# Altium PCB PCB2.PcbDoc (part 2 of 3)
Units mil, origin at the board's own origin, x right, y up, seen from the top; angles counter-clockwise.
Board outline 11695.71 x 3821.7 mil, 2 copper layers (Top Layer, Bottom Layer), stack 16 mil thick; 124 components, 59 nets, 380 pads, 1798 vias.
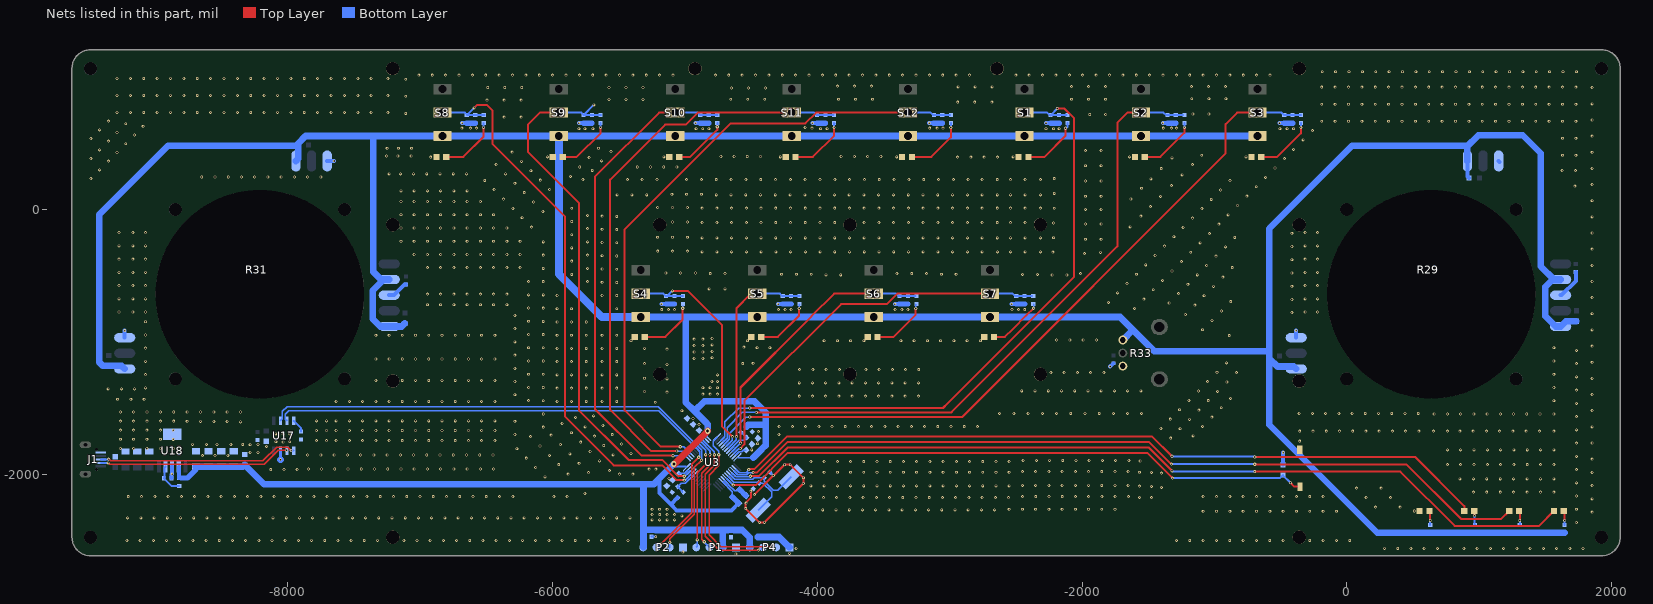
[diagram p2: the nets of this part, all layers, seen from the top]

## Via types
v1: diameter 22, hole 12, Top Layer to Bottom Layer, tented both sides, 1735 vias
v2: diameter 24, hole 12, Top Layer to Bottom Layer, tented both sides, 61 vias
v3: diameter 44, hole 22, Top Layer to Bottom Layer, tented both sides, 2 vias

## Nets (pads, with @x,y where several pads share a name; then routed paths per layer and width w, separated by ;. In a path a pad name is that pad's centre, name@x,y a point inside that pad or via, vN(x,y) a via of type N, cw(c..) or ccw(c..) an arc to the next point about the centre after c; other vN are vias at no path point) (continued)
AGND: "pad. "@-358.47,1063.88 "pad. "@-358.47,-116.12 "pad. "@-358.47,-1296.12 "pad. "@-358.47,-2476.12 "pad. "@-2314.51,-115 "pad. "@-2314.51,-1245 "pad. "@-2641.47,1063.88 "pad. "@-3752.26,-115 "pad. "@-3752.26,-1245 "pad. "@-4924.47,1063.88 "pad. "@-5190,-115 "pad. "@-5190,-1245 "pad. "@-7207.47,1063.88 "pad. "@-7207.47,-116.12 "pad. "@-7207.47,-1296.12 "pad. "@-7207.47,-2476.12 C1.1 C2.1 C3.2 C4.2 C5.2 C6.2 C7.2 C8.2 C9.2 C10.2 C11.2 C12.2 C13.2 C14.2 C15.1 C16.1 C17.2 C18.1 C19.1 C26.1 C27.1 C28.2 C30.1 C43.1 C44.1 C45.1 C46.1 C47.1 C48.1 C49.1 C66.2 C67.2 C68.2 C69.2 C70.2 C71.2 C72.2 C73.2 C102.2 C103.2 C104.2 C108.2 J1.5 P1.1 P2.1 P4.1 R2.1 R4.1 R6.1 R8.1 R10.1 R12.1 R14.1 R16.1 R18.1 R20.1 R22.1 R24.1 R29.3 R29.6 R29.11 R30.1 R31.3 R31.6 R31.11 R32.1 R33.3 R82.1 R83.1 R88.2 U1.2 U2.2 U3.8 U3.23 U3.35 U3.47 U4.2 U5.2 U6.2 U7.2 U8.2 U9.2 U10.2 U11.2 U12.2 U13.2 U17.3 U18.3 U18.6 U21.2 Y6.2 | length 4070.4
  Top Layer w15: v1(-4501.77,-2128.43) -4501.77,-2176.77 -4537.67,-2212.67 v1(-4537.67,-2218.5) -4540.41,-2221.24 v1(-4540.41,-2260.07) v1(-4436.98,-2363.5) v1(-4398.72,-2363.5) v1(-4105.41,-2070.2) v1(-4105.41,-2026.94) v1(-4203.84,-1928.5) v1(-4247.67,-1928.5) -4329.17,-2010 v1(-4331.28,-2010) v1(-4475,-2153.72)
  Top Layer w30: U8.2@-6879.26,395 U8.2@-6877.39,396.87
  Bottom Layer w10: C71.2@-5047.68,-1998.96 -5040.73,-1992 -5002,-1992 U3.23@-4980,-1970 ; U3.8@-4700.85,-2044.46 -4667.34,-2077.97 -4667.34,-2082.66 -4624.99,-2125 -4593.75,-2125 C103.2@-4585.58,-2116.82 ; U3.47@-4617.33,-1857.94 -4589.29,-1829.9 -4572.37,-1829.9 -4560.76,-1818.29 C73.2@-4538.26,-1818.29 ; C69.2@-4539.06,-2163.33 C69.2@-4537.64,-2163.33 C69.2@-4533.93,-2163.33
  Bottom Layer w15: C19.1@-5252.97,-2472.3 v1(-5220,-2472.3) ; C26.1@-4357.42,-1985.29 -4355.99,-1985.29 v1(-4331.28,-2010)
  Bottom Layer w25: v1@-8055.47,-1889.85 U17.3@-8055.47,-1822.09
  Bottom Layer w30: R31.11@-9231.75,-968.5 v1(-9231.75,-915) ; R88.2@-8877.08,-2030.5 -8877.08,-2003.26 v1(-8873.66,-1999.84) U18.3@-8873.66,-1943.04 ; R31.6@-7702.23,366.14 v1(-7650,366.14) ; R31.3@-7233.72,-647.64 -7197.64,-647.64 -7116.92,-566.92 R32.1@-7106.54,-566.92 ; v1(-6682.81,652.19) C10.2@-6647.7,652.19 ; v1(-5800.67,652.19) C11.2@-5765.56,652.19 ; v1@-5178.52,-714.84 v1(-5177.88,-714.84) C6.2@-5143.42,-714.84 ; v1(-4918.52,652.19) C12.2@-4883.42,652.19 ; v1@-4296.6,-714.84 v1(-4295.95,-714.84) C7.2@-4261.49,-714.84 ; v1(-4036.38,652.19) C13.2@-4001.27,652.19 ; v1@-3414.67,-714.84 v1(-3414.02,-714.84) C8.2@-3379.56,-714.84 ; v1(-3154.24,652.19) C14.2@-3119.13,652.19 ; v1@-2532.74,-714.84 v1(-2532.1,-714.84) C9.2@-2496.99,-714.84 ; v1(-2272.1,652.19) C3.2@-2236.99,652.19 ; v1(-1787.05,-1186.63) C28.2@-1762.23,-1161.81 ; v1(-1389.95,652.19) C4.2@-1354.84,652.19 ; v1(-507.81,652.19) C5.2@-472.7,652.19 ; C108.2@-482.51,-1928.26 -480,-1925.75 v1(-480,-1837.41) ; R29.11@-381.89,-968.5 v1(-381.89,-915) ; R29.6@1147.64,366.14 R29.6@1154.22,359.56 ; R29.3@1616.14,-647.64 1622.23,-647.64 1730.5,-539.37 R30.1@1730.5,-471.92
  Bottom Layer w40: C10.2@-6647.7,652.19 R16.1@-6583.6,652.19 ; C11.2@-5765.56,652.19 R18.1@-5701.59,652.19 R18.1@-5701.46,652.19 ; C6.2@-5143.42,-714.84 R8.1@-5079.31,-714.84 ; C12.2@-4883.42,652.19 R20.1@-4820,652.19 R20.1@-4819.31,652.19 ; C103.2@-4585.58,-2116.82 C69.2@-4539.06,-2163.33 ; C7.2@-4261.49,-714.84 C7.2@-4261.27,-714.84 R10.1@-4197.39,-714.84 ; C13.2@-4001.27,652.19 R22.1@-3937.56,652.19 R22.1@-3937.17,652.19 ; C8.2@-3379.56,-714.84 C8.2@-3379.13,-714.84 R12.1@-3315.46,-714.84 ; C14.2@-3119.13,652.19 R24.1@-3055.54,652.19 R24.1@-3055.03,652.19 ; C9.2@-2496.99,-714.84 R14.1@-2433.53,-714.84 ; C3.2@-2236.99,652.19 R2.1@-2173.53,652.19 R2.1@-2172.89,652.19 ; C4.2@-1354.84,652.19 R4.1@-1290.74,652.19 ; C5.2@-472.7,652.19 R6.1@-409.5,652.19 R6.1@-408.6,652.19
  Bottom Layer w50: v1@-8055.47,-1889.85 v1(-8055,-1890.32) ; C18.1@-4450.55,-2474.6 -4288.4,-2474.6 P4.1@-4210,-2553
  other v1: -4615,-2603 -4210,-2597.67 -5015,-2589.28 -4160,-2560 285,-2560 385,-2560 485,-2560 585,-2560 685,-2560 785,-2560 885,-2560 985,-2560 1085,-2560 1185,-2560 1285,-2560 1385,-2560 1485,-2560 1585,-2560 1685,-2560 1785,-2560 -9215,-2500 -9115.39,-2500 -9015.79,-2500 -8916.18,-2500 -8816.58,-2500 -8716.97,-2500 -8617.37,-2500 -8517.76,-2500 -8418.16,-2500 -8318.55,-2500 -8218.95,-2500 -8119.34,-2500 -8019.74,-2500 -7920.13,-2500 -7820.53,-2500 -7720.92,-2500 -7621.32,-2500 -7521.71,-2500 -7422.11,-2500 -7322.5,-2500 -7222.9,-2500 -7123.29,-2500 -7023.69,-2500 -6924.08,-2500 -6824.48,-2500 -6724.87,-2500 -6625.26,-2500 -6525.66,-2500 -6426.05,-2500 -6326.45,-2500 -6226.84,-2500 -6127.24,-2500 -6027.63,-2500 -5928.03,-2500 -5828.42,-2500 -5728.82,-2500 -5629.21,-2500 -5529.61,-2500 -5430,-2500 -1287.11,-2500 -1186.32,-2500 -1085.53,-2500 -984.74,-2500 -883.95,-2500 -783.16,-2500 -682.37,-2500 -581.58,-2500 -480.79,-2500 -380,-2500 -279.35,-2500 -178.69,-2500 -78.03,-2500 22.63,-2500 1735,-2365 -5247.1,-2345 -5190.58,-2345 -5134.06,-2345 -5077.54,-2345 -9210,-2330 -9110.13,-2330 -9010.26,-2330 -8910.39,-2330 -8810.53,-2330 -8710.66,-2330 -8610.79,-2330 -8510.92,-2330 -8411.05,-2330 -8311.18,-2330 -8211.32,-2330 -8111.45,-2330 -8011.58,-2330 -7911.71,-2330 -7811.84,-2330 -7711.97,-2330 -7612.11,-2330 -7512.24,-2330 -7412.37,-2330 -7312.5,-2330 -7212.63,-2330 -7112.76,-2330 -7012.9,-2330 -6913.03,-2330 -6813.16,-2330 -6713.29,-2330 -6613.42,-2330 -6513.55,-2330 -6413.68,-2330 -6313.82,-2330 -6213.95,-2330 -6114.08,-2330 -6014.21,-2330 -5914.34,-2330 -5814.47,-2330 -5714.61,-2330 -5614.74,-2330 -5514.87,-2330 -5415,-2330 -5023.11,-2315 -5247.1,-2305 -5190,-2305 -5134.06,-2305 -5077.54,-2305 1853.73,-2286.35 -1084.61,-2280 -983.95,-2280 -883.29,-2280 -782.64,-2280 -681.98,-2280 -581.32,-2280 -480.66,-2280 -380,-2280 -279.35,-2280 -178.69,-2280 -78.03,-2280 510,-2278.13 -4158.03,-2270 -4058.16,-2270 -3958.29,-2270 -3858.42,-2270 -3758.55,-2270 -3658.68,-2270 -3558.82,-2270 -3458.95,-2270 -3359.08,-2270 -3259.21,-2270 -3159.34,-2270 -3059.47,-2270 -2959.61,-2270 -2859.74,-2270 -2759.87,-2270 -2660,-2270 -5247.1,-2265 -5190.58,-2265 -5134.06,-2265 -2550,-2265 -2450.13,-2265 -2350.26,-2265 -2250.39,-2265 -2150.53,-2265 -2050.66,-2265 -1950.79,-2265 -1850.92,-2265 -1751.05,-2265 1735,-2265 218.28,-2248.28 403.28,-2248.28 1853.73,-2186.35 -4053.03,-2176.56 -3953.16,-2176.56 -3853.29,-2176.56 -3753.42,-2176.56 -3653.55,-2176.56 -3553.68,-2176.56 -3453.82,-2176.56 -3353.95,-2176.56 -3254.08,-2176.56 -3154.21,-2176.56 -3054.34,-2176.56 -2954.47,-2176.56 -2854.61,-2176.56 -2754.74,-2176.56 -2654.87,-2176.56 -2555,-2176.56 -1474.67,-2176.56 146.56,-2176.56 331.56,-2176.56 -1565,-2175 -9205,-2170 -9104.83,-2170 -9004.66,-2170 -8904.48,-2170 -8804.31,-2170 -8704.14,-2170 -8603.97,-2170 -8503.79,-2170 -8403.62,-2170 -8303.45,-2170 -8203.28,-2170 -8103.1,-2170 -8002.93,-2170 -7902.76,-2170 -7802.59,-2170 -7702.41,-2170 -7602.24,-2170 -7502.07,-2170 -7401.9,-2170 -7301.72,-2170 -7201.55,-2170 -7101.38,-2170 -7001.21,-2170 -6901.03,-2170 -6800.86,-2170 -6700.69,-2170 -6600.52,-2170 -6500.35,-2170 -6400.17,-2170 -6300,-2170 -2449,-2170 -2349.13,-2170 -2249.27,-2170 -2149.4,-2170 -2049.53,-2170 -1949.66,-2170 -1849.79,-2170 -1749.92,-2170 -1650.05,-2170 -1084.61,-2170 -983.95,-2170 -883.29,-2170 -782.64,-2170 -681.98,-2170 -581.32,-2170 -480.66,-2170 -380.01,-2170 -279.35,-2170 -178.69,-2170 -5990,-2169.06 -5890,-2169.06 1735,-2165 -5755,-2145 956.43,-2135.55 1057.86,-2135.55 1159.29,-2135.55 1260.71,-2135.55 1362.14,-2135.55 1463.57,-2135.55 1565,-2135.55 74.84,-2104.84 259.84,-2104.84 -1400,-2100 -1475.8,-2091.56 -1566.13,-2090 -4048.03,-2087.92 -3948.16,-2087.92 -3848.29,-2087.92 -3748.42,-2087.92 -3648.55,-2087.92 -3548.68,-2087.92 -3448.82,-2087.92 -3348.95,-2087.92 -3249.08,-2087.92 -3149.21,-2087.92 -3049.34,-2087.92 -2949.47,-2087.92 -2849.61,-2087.92 -2749.74,-2087.92 -2649.87,-2087.92 -2550,-2087.92 1853.73,-2086.35 -2450.13,-2085 -2350.26,-2085 -2250.39,-2085 -2150.53,-2085 -2050.66,-2085 -1950.79,-2085 -1850.92,-2085 -1751.05,-2085 -1651.18,-2085 1735,-2065 855,-2035 956.43,-2035 1057.86,-2035 1159.29,-2035 1260.71,-2035 1362.14,-2035 1463.57,-2035 1565,-2035 -5120,-2032 -6057.16,-2019.93 -5493.83,-2000 -5393.16,-2000 -5882.16,-1998.96 -1400,-1992.3 -5728.1,-1987.84 -1475.8,-1986.56 1853.73,-1986.35 -4048.03,-1985 -3948.16,-1985 -3848.29,-1985 -3748.42,-1985 -3648.55,-1985 -3548.68,-1985 -3448.82,-1985 -3348.95,-1985 -3249.08,-1985 -3149.21,-1985 -3049.34,-1985 -2949.47,-1985 -2849.61,-1985 -2749.74,-1985 -2649.87,-1985 -2550,-1985 -1566.13,-1985 -2450.13,-1980 -2350.26,-1980 -2250.39,-1980 -2150.53,-1980 -2050.66,-1980 -1950.79,-1980 -1850.92,-1980 -1751.05,-1980 -1651.18,-1980 -5570,-1973.42 -8128.81,-1965.39 -8028.81,-1965.39 -7928.81,-1965.39 1735,-1965 -5270,-1961.76 -5219.67,-1961.89 -7845,-1960.95 -7745,-1960.95 -7645,-1960.95 -7545,-1960.95 -7445,-1960.95 -7345,-1960.95 -7245,-1960.95 -7145,-1960.95 -7045,-1960.95 -6945,-1960.95 -6845,-1960.95 -6745,-1960.95 -6645,-1960.95 -6545,-1960.95 -6445,-1960.95 -6127.87,-1949.22 -5952.87,-1928.25 760,-1928.26 860.62,-1928.26 961.25,-1928.26 1061.87,-1928.26 1162.5,-1928.26 1263.12,-1928.26 1363.75,-1928.26 1464.37,-1928.26 1565,-1928.26 -5798.81,-1917.13 -4048.03,-1905 -3948.16,-1905 -3848.29,-1905 -3748.42,-1905 -3648.55,-1905 -3548.68,-1905 -3448.82,-1905 -3348.95,-1905 -3249.08,-1905 -3149.21,-1905 -3049.34,-1905 -2949.47,-1905 -2849.61,-1905 -2749.74,-1905 -2649.87,-1905 -2550,-1905 -1561,-1900 -5645.19,-1899.13 -2445,-1895 -2345.13,-1895 -2245.26,-1895 -2145.39,-1895 -2045.53,-1895 -1945.66,-1895 -1845.79,-1895 -1745.92,-1895 -1646.05,-1895 1853.73,-1886.35 -6198.58,-1878.51 1735,-1865 -8645,-1860 -8550,-1860 -8451.97,-1857.94 -6023.58,-1857.54 -7850,-1855 -7750,-1855 -7650,-1855 -7550,-1855 -7450,-1855 -7350,-1855 -7250,-1855 -7150,-1855 -7050,-1855 -6950,-1855 -6850,-1855 -6750,-1855 -6650,-1855 -6550,-1855 -6450,-1855 -5542.16,-1854.14 -5869.52,-1846.42 -5407.16,-1842.84 -8285,-1835 -8225,-1835 -5715.9,-1828.42 -4495,-1816.18 760,-1816.18 860.62,-1816.18 961.25,-1816.18 1061.87,-1816.18 1162.5,-1816.18 1263.12,-1816.18 1363.75,-1816.18 1464.37,-1816.18 1565,-1816.18 -6269.29,-1807.8 -9265,-1806.12 -9165,-1806.12 -9065,-1806.12 -8962.32,-1806.12 -8865,-1806.12 -8160,-1790 -6094.29,-1786.83 -5612.87,-1783.43 -8285,-1777.4 -5940.23,-1775.71 -8720,-1775 -8615,-1775 -8535,-1775 -8430,-1775 -8225,-1775 -8340,-1774.42 -5477.87,-1772.13 -4450.47,-1770 1735,-1765 1853.73,-1764.34 -5786.61,-1757.71 -8035,-1756.72 -8090,-1755 -7985,-1755 -354.85,-1750.15 -7783.9,-1746.58 -7707.32,-1746.58 -7635,-1746.58 -7535,-1746.58 -7435,-1746.58 -7335,-1746.58 -7235,-1746.58 -7135,-1746.58 -7035,-1746.58 -6935,-1746.58 -6835,-1746.58 -6735,-1746.58 -6635,-1746.58 -6535,-1746.58 -6435,-1746.58 -8865,-1737.09 -9265,-1736.25 -9165,-1736.25 -9065,-1736.25 -8962.32,-1735.82 -1329.29,-1727.58 -6165,-1716.12 -5683.58,-1712.72 -1160,-1710 -6010.94,-1705 -5548.58,-1701.42 -6285,-1700 -4290,-1699.4 -8035,-1696.72 -8090,-1695 -7985,-1695 -5857.32,-1687 -4445,-1677.85 -355,-1675 -255,-1675 -155,-1675 -55,-1675 45,-1675 145,-1675 245,-1675 345,-1675 445,-1675 545,-1675 655,-1675 760,-1675 855,-1675 955,-1675 1055,-1675 1155,-1675 1255,-1675 1355,-1675 1455,-1675 1565,-1675 -7783.9,-1670 -7707.32,-1670 -7635,-1670 -7535,-1670 -7435,-1670 -7335,-1670 -7235,-1670 -7135,-1670 -7035,-1670 -6935,-1670 -6835,-1670 -6735,-1670 -6635,-1670 -6535,-1670 -6435,-1670 -8865,-1668.06 -9265,-1667.5 -9165,-1667.5 -9065,-1667.5 -8962.32,-1667.21 1735,-1665 -1258.58,-1656.87 -1404.29,-1654.29 -6070,-1645 -5754.29,-1642.01 1853.73,-1642.32 -4288.03,-1640.27 -4188.16,-1640.27 -4088.29,-1640.27 -3988.42,-1640.27 -3888.55,-1640.27 -3788.68,-1640.27 -3688.82,-1640.27 -3588.95,-1640.27 -3489.08,-1640.27 -3389.21,-1640.27 -3289.34,-1640.27 -3189.47,-1640.27 -3089.61,-1640.27 -2989.74,-1640.27 -2889.87,-1640.27 -2790,-1640.27 -1089.29,-1639.29 -5619.29,-1630.71 -4893.31,-1625.33 -5928.03,-1616.29 -8356.97,-1605 -8659.65,-1601.25 -8558.76,-1601.25 -8457.86,-1601.25 -8760.54,-1600 -6285,-1600 -9265,-1598.75 -9164.11,-1598.75 -9063.22,-1598.75 -8861.43,-1599.03 -8962.32,-1598.61 -7783.9,-1597.68 -7707.32,-1597.68 -7635,-1597.68 -7535,-1597.68 -7435,-1597.68 -7335,-1597.68 -7235,-1597.68 -7135,-1597.68 -7035,-1597.68 -6935,-1597.68 -6835,-1597.68 -6735,-1597.68 -6635,-1597.68 -6535,-1597.68 -6435,-1597.68 -1187.87,-1586.16 -1333.58,-1583.58 -4939.08,-1578.91 -5825,-1571.3 -1018.58,-1568.58 1735,-1565 -5690,-1560 -6070,-1545 660,-1545 760,-1545 860,-1545 960,-1545 1060,-1545 1160,-1545 1260,-1545 1360,-1545 1460,-1545 1565,-1545 -2622.22,-1540 -2514.75,-1540 -2407.28,-1540 -2299.81,-1540 -2192.34,-1540 -2084.87,-1540 -1977.41,-1540 -1869.94,-1540 -1762.47,-1540 -1655,-1540 -1550.01,-1540 -360,-1540 -260,-1540 -160,-1540 -60,-1540 40,-1540 140,-1540 240,-1540 340,-1540 440,-1540 540,-1540 -9265,-1530 -9164.11,-1530 -9063.22,-1530 -8962.32,-1530 -8861.43,-1530 -8760.54,-1530 -8659.65,-1530 -8558.76,-1530 -8457.86,-1530 -8356.97,-1530 -5023.11,-1520.38 1853.73,-1520.31 -1117.16,-1515.45 -1262.87,-1512.87 -947.87,-1497.87 1735,-1465 -5223.68,-1456.32 -7635,-1450 -7535,-1450 -7435,-1450 -7335,-1450 -7235,-1450 -7135,-1450 -7035,-1450 -6935,-1450 -6835,-1450 -6735,-1450 -6635,-1450 -6535,-1450 -6435,-1450 -5965,-1450 -5857.32,-1450 -5745,-1450 -5625,-1450 -5514.53,-1450 -6180,-1444.74 -6070,-1445 -1046.45,-1444.74 1565,-1445 -1192.16,-1442.16 -9285,-1434.11 -9185,-1434.11 -9085,-1434.11 -877.16,-1427.16 -4136.42,-1410 -4036.42,-1410 -3936.42,-1410 -3836.42,-1410 -3736.42,-1410 -3636.42,-1410 -3536.42,-1410 -3436.42,-1410 -3336.42,-1410 -3236.42,-1410 -6285,-1400 1853.73,-1398.29 -4864.28,-1395 -4809.75,-1395 -4755.21,-1395 -5135,-1380 -5305,-1375 -975.74,-1374.02 -1121.45,-1371.45 -2455,-1370 -2355,-1370 -2255,-1370 -2155,-1370 -2055,-1370 -1955,-1370 -1855,-1370 -1755,-1370 -1655,-1370 -1555,-1370 1735,-1365 -9357.65,-1355 -9257.65,-1355 -9157.65,-1355 -5965,-1350 -5857.32,-1350 -5745,-1350 -5625,-1350 -5514.53,-1350 -9075,-1348.13 -4864.28,-1346.67 -4809.75,-1346.67 -4755.21,-1346.67 -6180,-1344.74 -6070,-1345 1565,-1345 -4136.42,-1310 -4036.42,-1310 -3936.42,-1310 -3836.42,-1310 -3736.42,-1310 -3636.42,-1310 -3536.42,-1310 -3436.42,-1310 -3336.42,-1310 -3236.42,-1310 -905.03,-1303.31 -1050.74,-1300.74 -6285,-1300 -4796.74,-1298.33 -4755.21,-1298.33 -7335,-1291.14 -7235,-1291.14 -7135,-1291.14 -7035,-1291.14 -6935,-1291.14 -6835,-1291.14 -6735,-1291.14 -6635,-1291.14 -6535,-1291.14 -6435,-1291.14 -5135,-1280 1853.73,-1276.28 -5305,-1275 1735,-1265 -5965,-1250 -5857.32,-1250 -5745,-1250 -5625,-1250 -5514.53,-1250 -4755.21,-1250 -9075,-1248.13 -6180,-1244.74 -6070,-1245 1565,-1245 -2335,-1232.6 -2235,-1232.6 -2135,-1232.6 -2035,-1232.6 -1935,-1232.6 -1835,-1232.6 -834.31,-1232.6 -980.03,-1230.03 -4133.07,-1210 -4033.07,-1210 -3933.07,-1210 -3833.07,-1210 -3733.07,-1210 -3633.07,-1210 -3533.07,-1210 -3433.07,-1210 -3333.07,-1210 -3233.07,-1210 -6285,-1200 -5135,-1170 -5305,-1165 -4562.7,-1165 1735,-1165 -4485,-1161.81 -909.31,-1159.31 1853.73,-1154.26 -5965,-1150 -5857.32,-1150 -5745,-1150 -5625,-1150 -5514.53,-1150 -9075,-1148.13 -6180,-1144.74 -6070,-1145 1565,-1145 -7335,-1130 -7235,-1130 -7135,-1130 -7035,-1130 -6935,-1130 -6835,-1130 -6735,-1130 -6635,-1130 -6535,-1130 -6435,-1130 -4930,-1125 -4864.28,-1125 -4794.11,-1120 -6285,-1100 -4930,-1076.67 -4864.28,-1076.67 -4794.11,-1071.67 1735,-1065 -5135,-1055 -5965,-1050 -5857.32,-1050 -5745,-1050 -5625,-1050 -5514.53,-1050 -5305,-1050 -9075,-1048.13 -6180,-1044.74 -6070,-1045 -4453.99,-1045 -4357.42,-1045 1565,-1045 -4555,-1040 1853.73,-1032.25 -4930,-1028.33 -4864.28,-1028.33 -4794.11,-1023.33 -6285,-1000 -5407.03,-991.94 -4527.44,-991.94 -3947.85,-991.94 -3847.85,-991.94 -3747.85,-991.94 -3647.85,-991.94 -3368.26,-991.94 -3268.26,-991.94 -3168.26,-991.94 -3068.26,-991.94 -2968.26,-991.94 -2868.26,-991.94 -2768.26,-991.94 -2191.32,-986.44 -2091.32,-986.44 -1991.32,-986.44 -1891.32,-986.44 -4930,-980 -4864.28,-980 -4794.11,-975 -887.84,-952.84 -7335,-950 -7235,-950 -7135,-950 -7035,-950 -6935,-950 -6835,-950 -6735,-950 -6635,-950 -6535,-950 -6435,-950 -5965,-950 -5857.32,-950 -5745,-950 -5625,-950 -5514.53,-950 -9075,-948.13 -6180,-944.74 -6070,-945 1853.73,-910.23 -1088.55,-908.55 -6285,-900 -5965,-850 -5857.32,-850 -5745,-850 -9075,-848.13 -6180,-844.74 -6070,-845 -1017.84,-837.84 -6285,-800 -1218.55,-793.55 1853.73,-788.22 -415,-780 -9275,-775 -9170,-775 -9075,-775 -315,-775 -220,-775 -947.13,-767.13 -5174.56,-757.03 -5124.36,-757.03 -5078.67,-757.03 -4293.28,-757.03 -4243.07,-757.03 -4197.39,-757.03 -3411.35,-757.03 -3361.14,-757.03 -3315.46,-757.03 -2528.78,-757.03 -2478.57,-757.03 -2432.89,-757.03 -5965,-750 -5857.32,-750 -5514.53,-750 -1602.94,-747.75 -6180,-744.74 -6070,-745 -1147.84,-722.84 -6945,-720 -6845,-720 -6745,-720 -6645,-720 -6545,-720 -6445,-720 -6345,-720 -1341.4,-706.4 -1801.4,-701.4 -876.42,-696.42 -415,-680 -1532.22,-677.04 -9275,-675 -9170,-675 -9075,-675 -315,-675 -220,-675 1853.73,-666.2 -1077.13,-652.13 -5965,-650 -5625,-650 -5514.53,-650 -6180,-644.74 -6070,-645 -6945,-640 -6845,-640 -6745,-640 -6645,-640 -6545,-640 -6445,-640 -6345,-640 -1270.69,-635.69 -1730.69,-630.69 -1461.51,-606.33 -4816.89,-600 -4696.89,-600 -1006.42,-581.42 -415,-580 -9275,-575 -9170,-575 -9075,-575 -315,-575 -220,-575 -1199.97,-564.97 -1659.97,-559.97 -5514.53,-551.81 -5625,-549.81 -6180,-544.74 -6070,-545 -5735,-545 1853.73,-544.19 -1390.8,-535.62 -935.71,-510.71 -2226.11,-495 -2114.15,-495 -3933.87,-494.26 -3822.55,-494.26 -1129.26,-494.26 -5855,-490.79 -2449,-490 -2337.69,-490 -4269.36,-489.26 -4157.4,-489.26 -4045.45,-489.26 -3062.63,-489.26 -2951.32,-489.26 -1589.26,-489.26 -4808.21,-485 -4696.89,-485 -2010,-485 -3398.12,-484.26 -3286.17,-484.26 -3174.21,-484.26 -5143.7,-480 -5031.74,-480 -4919.79,-480 -415,-480 -9275,-475 -9170,-475 -9075,-475 -315,-475 -220,-475 -1320.09,-464.91 -5514.53,-451.81 -5625,-449.81 -6070,-445 -5735,-445 -6945,-440 -6845,-440 -6745,-440 -6645,-440 -6545,-440 -6445,-440 -6345,-440 -6245,-440 -865,-440 -1058.55,-423.55 1853.73,-422.17 -1518.55,-418.55 -1249.38,-394.2 -5855,-390.79 -415,-380 -9275,-375 -9170,-375 -9075,-375 -315,-375 -220,-375 -987.84,-352.84 -5514.53,-351.81 -5625,-349.81 -1447.84,-347.84 -6070,-345 -5735,-345 -7045,-340 -6945,-340 -6845,-340 -6745,-340 -6645,-340 -6545,-340 -6445,-340 -6345,-340 -6245,-340 -1982.41,-333.68 -1860,-323.68 -1178.67,-323.49 -2220,-322.17 -4869.51,-320 -4758.2,-320 -4646.88,-320 -4535.56,-320 -4424.25,-320 -4312.93,-320 -4201.62,-320 -4090.3,-320 -3978.99,-320 -3867.67,-320 -3756.35,-320 -3645.04,-320 -3533.72,-320 -3422.41,-320 -3311.09,-320 -3199.78,-320 -3088.46,-320 -2977.14,-320 -2865.83,-320 -2754.51,-320 -2639.51,-320 -2539.51,-320 -2429.51,-320 -2314.51,-320 -5205,-315 -5093.04,-315 -4981.09,-315 1853.73,-300.16 -5855,-290.79 -917.13,-282.13 -415,-280 -1377.13,-277.13 -9275,-275 -9170,-275 -9075,-275 -315,-275 -220,-275 -1107.96,-252.78 -5514.53,-251.81 -5625,-249.81 -6070,-245 -5735,-245 -7145,-240 -7045,-240 -6945,-240 -6845,-240 -6745,-240 -6645,-240 -6545,-240 -6445,-240 -6345,-240 -6245,-240 -1975,-225 -1855,-225 -4870,-215 -4758.68,-215 -4647.37,-215 -4536.05,-215 -4424.74,-215 -4313.42,-215 -4202.11,-215 -4090.79,-215 -3979.47,-215 -3868.16,-215 -3756.84,-215 -3645.53,-215 -3534.21,-215 -3422.9,-215 -3311.58,-215 -3200.26,-215 -3088.95,-215 -2977.63,-215 -2866.32,-215 -2755,-215 -2640,-215 -2540,-215 -2430,-215 -2315,-215 -2215,-213.68 -846.42,-211.42 -5205.49,-210 -5093.53,-210 -4981.58,-210 -1306.42,-206.42 -5855,-190.79 -1037.25,-182.06 -415,-180 1853.73,-178.14 -9275,-175 -9170,-175 -9075,-175 -315,-175 -220,-175 -5514.53,-151.81 -5625,-149.81 -5735,-145 -7145,-140 -7045,-140 -6945,-140 -6845,-140 -6745,-140 -6645,-140 -6545,-140 -6445,-140 -6345,-140 -1235.71,-135.71 -6158.38,-133.55 -1636.13,-131.13 -966.54,-111.35 -1975,-110 -1855,-110 -2215,-102.37 -4870,-100 -4758.68,-100 -4647.37,-100 -4536.05,-100 -4424.74,-100 -4313.42,-100 -4202.11,-100 -4090.79,-100 -3979.47,-100 -3868.16,-100 -3756.84,-100 -3645.53,-100 -3534.21,-100 -3422.9,-100 -3311.58,-100 -3200.26,-100 -3088.95,-100 -2977.63,-100 -2866.32,-100 -2755,-100 -2640,-100 -2540,-100 -2430,-100 -2315,-100 -5205.49,-95 -5093.53,-95 -4981.58,-95 -5855,-90.79 -1165,-65 -6229.09,-62.84 1853.73,-56.13 -5514.53,-51.81 -5625,-49.81 -1554.81,-49.81 -5735,-45 -895.83,-40.64 -7145,-40 -7045,-40 -6945,-40 -6845,-40 -6745,-40 -6645,-40 -6545,-40 -6445,-40 -6072.5,-14.45 -1975,0 -1855,0 -1094.29,5.71 -6299.8,7.87 -5855,9.21 -2210,9.21 -4870,10 -4758.68,10 -4647.37,10 -4536.05,10 -4424.74,10 -4313.42,10 -4202.11,10 -4090.79,10 -3979.47,10 -3868.16,10 -3756.84,10 -3645.53,10 -3534.21,10 -3422.9,10 -3311.58,10 -3200.26,10 -3088.95,10 -2977.63,10 -2866.32,10 -2755,10 -2640,10 -2540,10 -2430,10 -2315,10 -5205.49,15 -5093.53,15 -4981.58,15 -1484.1,20.9 -825.12,30.07 -6143.21,56.26 -7145,60 -7045,60 -6945,60 -6845,60 -6745,60 -6645,60 -6545,60 1853.73,65.89 -1023.58,76.42 -6370.51,78.58 -1631.22,78.99 -1406.32,98.68 -1975,100 -1855,100 -754.41,100.78 -5511.96,110 -5400,110 -5288.04,110 -4763.42,110 -4651.84,110 -4540.26,110 -4428.68,110 -4317.11,110 -4205.53,110 -4093.95,110 -3982.37,110 -3870.79,110 -3759.21,110 -3647.63,110 -3536.05,110 -3424.47,110 -3312.9,110 -3201.32,110 -3089.74,110 -2978.16,110 -2866.58,110 -2755,110 -2640,110 -2540,110 -2430,110 -2315,110 -5098.91,115 -4986.96,115 -4875,115 -2210,121.17 -6213.92,126.97 -7145,140 -7045,140 -6945,140 -6845,140 -6745,140 -6645,140 -952.87,147.13 -6441.22,149.29 -6022.16,150.73 -1549.9,160.31 -683.7,171.49 1723.82,176.47 -1325,180 1853.73,187.9 -6284.63,197.68 -1975,215 -1855,215 -882.16,217.84 -6511.93,220 -6092.87,221.44 -5770.64,225 -5434.78,225 -5322.82,225 -5210.87,225 -4986.96,225 -4875,225 -4763.04,225 -4651.09,225 -4539.13,225 -4427.18,225 -4315.22,225 -4203.27,225 -4091.31,225 -3979.36,225 -3867.4,225 -3755.45,225 -3643.49,225 -3531.54,225 -3419.58,225 -3307.63,225 -3195.67,225 -3083.72,225 -2971.76,225 -2859.81,225 -2755,225 -2640,225 -2540,225 -2430,225 -2315,225 -1479.19,231.02 -9487.03,232.66 -2210,233.12 -612.99,242.2 -8650,245 -8550,245 -8450,245 -8350,245 -8250,245 -8150,245 -8050,245 -7950,245 -7850,245 -7750,245 -5865,250 -1243.68,261.32 -7235,268.39 -7150,268.39 -7050,268.39 -6950,268.39 -6850,268.39 -6750,268.39 -6650,268.39 -6355.34,268.39 -6163.58,292.15 1626.49,292.89 1727.55,292.89 -5699.93,295.71 -9421.35,298.61 -1401.41,308.8 1853.73,309.92 -542.28,312.91 -5794.29,320.71 -5360,320.93 -5260,320.93 -5160,320.93 -5060,320.93 -1975,330 -1855,330 -6426.05,339.1 -1165.9,339.1 -6234.29,362.86 -9355.68,364.55 -5629.22,366.42 -9487.03,383.83 -471.56,383.62 -1320.09,390.12 -5723.58,391.42 -6920,395 -2939.51,395 -2839.51,395 -2739.51,395 -2639.51,395 -6038.55,396.87 -5158.96,396.87 -4279.37,396.87 -3399.78,396.87 -2520.2,396.87 -1640.61,396.87 -761.02,396.87 -4728.68,400 -4628.68,400 -4528.68,400 -4428.68,400 -3820,400 -3720,400 -3620,400 -3520,400 -7253.44,403.91 -7168.44,403.91 -7068.44,403.91 1630.22,409.31 1731.27,409.31 -1095.19,409.81 -9290,430.5 1853.73,431.93 -6305,433.58 -5558.51,437.13 -1975,445 -1855,445 -9421.35,449.78 -400.85,454.33 -7250,462.16 -7165,462.16 -7065,462.16 -5652.87,462.13 -9224.32,496.45 -9355.68,515.72 -330.14,525.04 -9487.03,535 1630.22,537.88 1731.27,537.88 1853.73,553.95 -9158.65,562.4 -9290,581.67 -259.43,595.75 -9421.35,600.95 -5800.67,610 -5755,610 -5695,610 -4915.21,610 -4865,610 -4819.31,610 -3975,610 -3925,610 -2272.1,610 -2215,610 -2172.89,610 -505,610 -450,610 -400.85,610 -6685,615 -6620,615 -6575,615 -4040,615 -3150,615 -3095,615 -3050,615 -1386.58,615 -1325,615 -1285,615 -4091.31,620 -9092.97,628.34 -9224.32,647.62 -9355.68,666.89 -188.72,666.46 -87.67,666.46 13.38,666.46 114.44,666.46 215.49,666.46 316.54,666.46 417.59,666.46 518.64,666.46 619.7,666.46 720.75,666.46 821.8,666.46 922.85,666.46 1023.91,666.46 1124.96,666.46 1226.01,666.46 1327.06,666.46 1428.12,666.46 1529.17,666.46 1630.22,666.46 1731.27,666.46 1853.73,675.96 -6366.17,697.7 -6237.59,697.7 -1941.43,717.55 -1821.43,717.55 -1162.11,721.27 -1042.11,721.27 -7108.73,726.43 -7243.73,731.43 -9290,732.84 -9188.95,732.84 -9087.9,732.84 -8986.84,732.84 -8885.79,732.84 -8784.74,732.84 -8683.69,732.84 -8582.63,732.84 -8481.58,732.84 -8380.53,732.84 -8279.48,732.84 -8178.42,732.84 -8077.37,732.84 -7976.32,732.84 -7875.27,732.84 -7774.21,732.84 -7673.16,732.84 -7572.11,732.84 -7471.06,732.84 -7370,732.84 -188.72,795.04 -87.67,795.04 13.38,795.04 114.44,795.04 215.49,795.04 316.54,795.04 417.59,795.04 518.64,795.04 619.7,795.04 720.75,795.04 821.8,795.04 922.85,795.04 1023.91,795.04 1124.96,795.04 1226.01,795.04 1327.06,795.04 1428.12,795.04 1529.17,795.04 1630.22,795.04 1731.27,795.04 1853.73,797.98 -2938.58,811.27 -2810.01,811.27 -2681.43,811.27 -6494.74,826.27 -6366.17,826.27 -6237.59,826.27 -5573.58,831.27 -5445.01,831.27 -5316.43,831.27 -4653.58,832.55 -4525,832.55 -4396.42,832.55 -3838.58,832.55 -3710.01,832.55 -3581.43,832.55 -2078.58,832.55 -1950.01,832.55 -1821.43,832.55 -1170.69,836.27 -1042.11,836.27 -913.53,836.27 -7108.73,855.01 -7243.73,860.01 -9290,861.42 -9188.95,861.42 -9087.9,861.42 -8986.84,861.42 -8885.79,861.42 -8784.74,861.42 -8683.69,861.42 -8582.63,861.42 -8481.58,861.42 -8380.53,861.42 -8279.48,861.42 -8178.42,861.42 -8077.37,861.42 -7976.32,861.42 -7875.27,861.42 -7774.21,861.42 -7673.16,861.42 -7572.11,861.42 -7471.06,861.42 -7370,861.42 -4648.58,917.55 -4520.01,917.55 -4391.43,917.55 1853.73,919.99 -6489.37,921.27 -6360.79,921.27 -6232.21,921.27 -5573.58,921.27 -5445.01,921.27 -5316.43,921.27 -188.72,923.62 -87.67,923.62 13.38,923.62 114.44,923.62 215.49,923.62 316.54,923.62 417.59,923.62 518.64,923.62 619.7,923.62 720.75,923.62 821.8,923.62 922.85,923.62 1023.91,923.62 1124.96,923.62 1226.01,923.62 1327.06,923.62 1428.12,923.62 1529.17,923.62 1630.22,923.62 1731.27,923.62 -2935.69,926.27 -2807.11,926.27 -2678.53,926.27 -2078.58,927.55 -1950.01,927.55 -1821.43,927.55 -1173.58,927.55 -1045.01,927.55 -916.43,927.55 -3848.58,931.27 -3720.01,931.27 -3591.43,931.27 -7108.73,983.58 -7243.73,988.58 -9290,990 -9188.95,990 -9087.9,990 -8986.84,990 -8885.79,990 -8784.74,990 -8683.69,990 -8582.63,990 -8481.58,990 -8380.53,990 -8279.48,990 -8178.42,990 -8077.37,990 -7976.32,990 -7875.27,990 -7774.21,990 -7673.16,990 -7572.11,990 -7471.06,990 -7370,990 -7010,1015 -6908.94,1015 -6807.89,1015 -6706.84,1015 -6605.79,1015 -6504.73,1015 -6403.68,1015 -6302.63,1015 -6201.58,1015 -6100.52,1015 -5999.47,1015 -5898.42,1015 -5797.37,1015 -5696.31,1015 -5595.26,1015 -5494.21,1015 -5393.16,1015 -5292.1,1015 -5191.05,1015 -5090,1015 -4770,1015 -4668.94,1015 -4567.89,1015 -4466.84,1015 -4365.79,1015 -4264.73,1015 -4163.68,1015 -4062.63,1015 -3961.58,1015 -3860.52,1015 -3759.47,1015 -3658.42,1015 -3557.37,1015 -3456.31,1015 -3355.26,1015 -3254.21,1015 -3153.16,1015 -3052.1,1015 -2951.05,1015 -2850,1015 -2500,1015 -2398.94,1015 -2297.89,1015 -2196.84,1015 -2095.79,1015 -1994.73,1015 -1893.68,1015 -1792.63,1015 -1691.58,1015 -1590.52,1015 -1489.47,1015 -1388.42,1015 -1287.37,1015 -1186.31,1015 -1085.26,1015 -984.21,1015 -883.16,1015 -782.1,1015 -681.05,1015 -580,1015 -185,1040.04 -83.94,1040.04 17.11,1040.04 118.16,1040.04 219.21,1040.04 320.27,1040.04 421.32,1040.04 522.37,1040.04 623.42,1040.04 724.48,1040.04 825.53,1040.04 926.58,1040.04 1027.63,1040.04 1128.69,1040.04 1229.74,1040.04 1330.79,1040.04 1431.84,1040.04 1532.9,1040.04 1633.95,1040.04 1735,1040.04
BOOT0: R40.1 R82.2 U3.44 | length 225.8
  Bottom Layer w10: U3.44@-4659.09,-1816.18 -4631.05,-1788.14 -4631.05,-1783.52 -4589.53,-1742 -4570.47,-1742 -4570.07,-1742.4 -4553.43,-1742.4 R82.2@-4533.86,-1722.83 -4574.11,-1682.58 R40.1@-4576.08,-1682.58
BOOT1: R81.1 R83.2 U3.20 | length 224.9
  Bottom Layer w10: R81.1@-5020.47,-2141.12 -5020.47,-2128.05 -5054.77,-2093.75 -5029.02,-2068 -4995.53,-2068 -4930.23,-2002.7 U3.20@-4929.13,-2002.7
CH330_D+: J1.3 U17.1 | length 1521.2
  Top Layer w10: v1@-9352.16,-1885 -9337.16,-1900 -8188.25,-1900 -8083.25,-1795 -8002.09,-1795 v1(-7975,-1822.09)
  Top Layer w15: v1(-9353.7,-1886.54) v1@-9352.16,-1885
  Bottom Layer w15: J1.3@-9412.42,-1888.51 -9357.65,-1888.51 -9354.14,-1885 -9353.7,-1885.43 v1(-9353.7,-1886.54) ; v1(-7975,-1822.09) U17.1@-7955.47,-1822.09
CH330_D-: J1.2 U17.2 | length 1451.4
  Top Layer w10: v1(-9356.81,-1915) -9346.81,-1925 -8177.81,-1925 -8072.81,-1820 v1(-8010,-1820)
  Bottom Layer w15: J1.2@-9412.42,-1914.11 v1@-9360.89,-1914.11 ; v1(-8010,-1820) -8007.56,-1820 U17.2@-8005.47,-1822.09
LED0: U3.2 U14.2 | length 5891.5
  Top Layer w15: v2(-4518.14,-1965) -4515.48,-1962.34 -4474.68,-1962.34 -4225.79,-1713.46 -1471.54,-1713.46 v2(-1320,-1865) ; v2(-695,-1870) 517.54,-1870 888.6,-2241.06 U14.2@888.6,-2278.13
  Bottom Layer w10: U3.2@-4617.33,-1960.95 -4589.49,-1988.79 -4585.55,-1988.79 -4585.35,-1988.99 -4537.95,-1988.99 -4516.05,-1967.09 v2(-4518.14,-1965)
  Bottom Layer w15: v2(-1320,-1865) -700,-1865 v2(-695,-1870)
LED1: U3.3 U15.2 | length 6242.4
  Top Layer w15: v2(-4485,-1987.84) -4456.47,-1987.84 -4448.63,-1980 -4223.64,-1755.01 -1494.17,-1755.01 v2(-1325,-1924.18) ; v2(-695,-1925) 450,-1925 863.06,-2338.06 1167.07,-2338.06 U15.2@1227,-2278.13
  Bottom Layer w10: U3.3@-4631.25,-1974.86 U3.3@-4627.32,-1978.79 ; U3.3@-4627.32,-1980.45 U3.3@-4627.32,-1978.79 ; v2(-4485,-1987.84) -4487.25,-1990.09 -4516.42,-1990.09 -4531.46,-2005.12 -4600.99,-2005.12 U3.3@-4627.32,-1978.79
  Bottom Layer w15: v2(-1325,-1924.18) -695.82,-1924.18 v2(-695,-1925)
LED2: U3.4 U16.2 | length 6629.8
  Top Layer w15: v2(-4505,-2015) -4505,-2011.19 -4502.85,-2013.34 -4439.66,-2013.34 -4224.62,-1798.3 -1496.7,-1798.3 v2(-1320,-1975) ; v1(-695,-1980) 405,-1980 815,-2390 1453.53,-2390 U16.2@1565.4,-2278.13
  Bottom Layer w10: U3.4@-4645.81,-1989.43 -4646.45,-1988.79 U3.4@-4645.17,-1988.79 -4612.83,-2021.12 -4511.12,-2021.12 v2(-4505,-2015) ; v2(-4505,-2015) v2@-4505,-2011.63 ; v2(-4505,-2015) v2@-4505,-2011.63 ; v2@-4505,-2011.63 -4501.77,-2008.4 v2@-4505,-2011.63
  Bottom Layer w15: v2(-1320,-1975) -1315,-1980 v1(-695,-1980)
NetC17_1: C17.1 U17.8 | length 103.6
  Bottom Layer w15: U17.8@-7955.47,-1597.68 -7898.9,-1654.25 C17.1@-7898.9,-1677.85
NetR1_1: R1.1 U21.1 | length 455.4
  Top Layer w15: U21.1@-2404.65,396.87 -2283.13,396.87 -2125,555 v2(-2125,613.64)
  Bottom Layer w10: R1.1@-2108.79,650.25 R1.1@-2105.95,653.08
  Bottom Layer w15: v2(-2125,613.64) -2120.88,613.64 -2108.79,625.73 -2108.79,650.25 R1.1@-2108.79,652.08
NetR3_1: R3.1 U1.1 | length 448.9
  Top Layer w15: U1.1@-1525.07,396.87 -1407.42,396.87 -1226.36,577.93 v2(-1226.36,620)
  Bottom Layer w15: v2(-1226.36,620) R3.1@-1226.36,653.08
NetR5_1: R5.1 U2.1 | length 451.3
  Top Layer w15: U2.1@-645.48,396.87 -525.27,396.87 -346.78,575.36 v2(-346.78,620)
  Bottom Layer w10: R5.1@-346.78,652.08 R5.1@-346.78,653.08
  Bottom Layer w15: v2(-346.78,620) -344.5,622.28 R5.1@-344.5,652.08
NetR7_1: R7.1 U4.1 | length 458.1
  Top Layer w10: U4.1@-5315,-963.13 U4.1@-5303.42,-963.13
  Top Layer w15: U4.1@-5303.42,-963.13 -5148.13,-963.13 -5016.3,-831.3 v2(-5016.3,-746.36)
  Bottom Layer w10: v2(-5016.3,-746.36) R7.1@-5016.3,-726.48
NetR9_1: R9.1 U5.1 | length 453.5
  Top Layer w10: U5.1@-4435,-965 U5.1@-4423.83,-965
  Top Layer w15: U5.1@-4423.83,-963.13 -4298.13,-963.13 -4136.3,-801.3 v2(-4136.3,-748.23)
  Bottom Layer w10: v2(-4136.3,-748.23) -4136.3,-718.07 R9.1@-4133.07,-714.84
NetR11_1: R11.1 U6.1 | length 451.5
  Top Layer w10: U6.1@-3555,-965 U6.1@-3544.24,-965
  Top Layer w15: U6.1@-3544.24,-963.13 -3423.13,-963.13 -3256.3,-796.3 v2(-3256.3,-748.23)
  Bottom Layer w10: v2(-3256.3,-748.23) -3256.3,-720.21 R11.1@-3250.93,-714.84
NetR13_1: R13.1 U7.1 | length 421.3
  Top Layer w15: U7.1@-2664.65,-963.13 -2582.72,-963.13 -2524.79,-905.21 -2524.56,-905.21 -2420.14,-800.79 -2420.14,-800.56 v2(-2365.95,-746.36)
  Bottom Layer w10: R13.1@-2368.79,-714.84 -2365.95,-717.67 v2(-2365.95,-746.36)
NetR15_1: R15.1 U8.1 | length 465.4
  Top Layer w10: U8.1@-6820,395 U8.1@-6802.59,395
  Top Layer w15: U8.1@-6802.59,396.87 -6673.65,396.87 -6521.3,549.22 v2(-6521.3,620)
  Bottom Layer w15: v2(-6521.3,620) -6521.3,650.28 R15.1@-6519.5,652.08
NetR17_1: R17.1 U9.1 | length 448.9
  Top Layer w10: U9.1@-5935,396.87 U9.1@-5923,396.87
  Top Layer w15: U9.1@-5923,396.87 -5817.42,396.87 -5637.36,576.93 v2(-5637.36,620.01)
  Bottom Layer w10: R17.1@-5637.36,652.02 R17.1@-5636.3,653.08
  Bottom Layer w15: v2(-5637.36,620.01) -5637.36,652.02 R17.1@-5637.36,652.08
NetR19_1: R19.1 U10.1 | length 434.7
  Top Layer w10: U10.1@-5054.77,395 U10.1@-5043.42,395
  Top Layer w15: U10.1@-5043.42,396.87 -4960.17,396.87 -4755.21,601.83 v2(-4755.21,624.52)
  Bottom Layer w15: v2(-4755.21,624.52) R19.1@-4755.21,652.08
NetR21_1: R21.1 U11.1 | length 463.4
  Top Layer w15: U11.1@-4163.83,396.87 -4033.13,396.87 -3873.07,556.93 v2(-3873.07,620)
  Bottom Layer w10: R21.1@-3873.07,645.14 R21.1@-3865.13,653.08
  Bottom Layer w15: v2(-3873.07,620) -3873.07,645.14 R21.1@-3873.07,652.08
NetR23_1: R23.1 U12.1 | length 463.3
  Top Layer w15: U12.1@-3284.24,396.87 -3138.13,396.87 -2990.93,544.07 v2(-2990.93,619.03)
  Bottom Layer w10: R23.1@-2985.54,652.08 R23.1@-2985.54,653.08
  Bottom Layer w15: v2(-2990.93,619.03) R23.1@-2990.93,652.08
NetR25_2: R25.2 U13.1 | length 106.2
  Top Layer w15: U13.1@625,-2278.13 630.5,-2283.63 v1(630.5,-2350)
  Bottom Layer w15: R25.2@630.5,-2382.08 v1(630.5,-2350)
NetR26_2: R26.2 U14.1 | length 106.2
  Top Layer w15: U14.1@963.4,-2278.13 965,-2279.74 v1(965,-2313.56)
  Bottom Layer w15: v1(965,-2313.56) 965,-2378.25 R26.2@968.83,-2382.08
NetR27_2: R27.2 U15.1 | length 106.2
  Top Layer w15: U15.1@1301.8,-2278.13 1307.17,-2283.5 v1(1307.17,-2350)
  Bottom Layer w15: R27.2@1307.17,-2382.08 v1(1307.17,-2350)
NetR28_2: R28.2 U16.1 | length 106.1
  Top Layer w15: U16.1@1640.2,-2278.13 1645.5,-2283.44 v1(1645.5,-2350)
  Bottom Layer w15: R28.2@1645.5,-2382.08 v1(1645.5,-2350)
NetR51_2: R51.2 R88.1 U18.4 | length 233.2
  Bottom Layer w15: U18.4@-8923.66,-1943.04 -8930,-1949.38 -8930,-2023.58 R88.1@-8936.92,-2030.5 -8879.5,-2087.92 R51.2@-8820.5,-2087.92
NRST: C108.1 U3.7 Y6.1 | length 4580.8
  Top Layer w15: v2(-4634.75,-2082.71) -4465.55,-2082.71 -4222,-1839.16 -1505.84,-1839.16 v1(-1315,-2030) ; v1(-425,-2064.51) -395.81,-2093.71 Y6.1@-353.59,-2093.71
  Bottom Layer w10: U3.7@-4686.92,-2030.54 v2(-4634.75,-2082.71)
  Bottom Layer w15: v1(-1315,-2030) -506.75,-2030 -506.13,-2030.62 C108.1@-482.51,-2007 v1(-425,-2064.51)
OSCIN: C26.2 U3.5 Y1.12@-4195.13,-2020.73 | length 579.3
  Bottom Layer w10: U3.5@-4659.09,-2002.7 -4623.79,-2038 -4488.05,-2038 -4477.65,-2027.6 C26.2@-4399.74,-2027.6 -4399.74,-2053.35 -4330.72,-2122.36 -4296.77,-2122.36 Y1.12@-4195.13,-2020.73
OSCOUT: C27.2 U3.6 Y1.12@-4445.68,-2271.28 | length 555.5
  Bottom Layer w10: U3.6@-4673.01,-2016.62 -4629.92,-2059.71 -4446.88,-2059.71 C27.2@-4439.97,-2066.63 -4412.54,-2066.63 -4345,-2134.17 -4345,-2170.59 Y1.12@-4445.68,-2271.28
PA11: P1.4 U3.32 | length 825.7
  Top Layer w10: v2(-4906.11,-2496.31) -4906.11,-1987.23 -4843.79,-1924.91 v2(-4843.79,-1853.09)
  Bottom Layer w10: P1.4@-4914,-2553 -4906.11,-2545.11 v2(-4906.11,-2496.31) ; U3.32@-4887.37,-1774.42 -4843.79,-1818 v2(-4843.79,-1853.09)
PA12: P1.3 U3.33 | length 901.5
  Top Layer w10: v2(-4853.88,-2510) -4873.65,-2490.23 -4873.65,-1994.18 -4811.04,-1931.57 v2(-4811.04,-1851.04)
  Bottom Layer w10: U3.33@-4873.45,-1760.5 -4811.04,-1822.92 ; v2(-4853.88,-2510) -4853.88,-2513.12 P1.3@-4814,-2553 ; v2(-4811.04,-1851.04) -4811.04,-1822.92 ; v2@-4810,-1855 -4810,-1823.96 -4811.04,-1822.92
PB3: C3.1 R1.2 R2.2 S1.2 U3.39 | length 5004.5
  Top Layer w15: v2(-4510,-1500) -3050,-1500 -3015,-1465 -2060,-510 -2060,690 -2132.59,762.59 v1(-2187.14,762.59)
  Bottom Layer w10: U3.39@-4728.69,-1746.58 -4697.47,-1715.37 -4697.47,-1602.47 -4595,-1500 v2(-4510,-1500)
  Bottom Layer w15: S1.2@-2434.18,732.16 -2264.15,732.16 -2244.65,712.66 C3.1@-2237.07,712.66 ; C3.1@-2239.83,709.9 C3.1@-2237.07,712.66 ; v1(-2187.14,762.59) C3.1@-2237.07,712.66 ; R1.2@-2116.45,712.66 C3.1@-2237.07,712.66
PB4: C4.1 R3.2 R4.2 S2.2 U3.40 | length 5109.8
  Top Layer w15: v2(-4459.45,-1533.74) -2988.74,-1533.74 -2971.62,-1516.62 -1733.38,-278.38 -1733.38,656.62 -1657.84,732.16 S2.2@-1554.59,732.16
  Bottom Layer w10: U3.40@-4714.76,-1760.5 -4681.47,-1727.21 -4681.47,-1649.65 ; -4680.47,-1647.68 -4566.52,-1533.74 v2(-4459.45,-1533.74)
  Bottom Layer w15: S2.2@-1554.59,732.16 -1384.56,732.16 -1365.06,712.66 R3.2@-1236.86,712.66
PB5: C5.1 R5.2 R6.2 S3.2 U3.41 | length 5551.2
  Top Layer w15: v2(-4510,-1568.23) -2906.76,-1568.23 -915,423.53 -915,645 -827.84,732.16 S3.2@-675,732.16
  Bottom Layer w10: U3.41@-4700.85,-1774.42 -4663.47,-1737.04 -4663.47,-1692.9 -4538.81,-1568.23 ; -4538.5,-1568.23 v2@-4517.08,-1568.23 ; R5.2@-344.61,712.03 R5.2@-344.5,711.92
  Bottom Layer w15: S3.2@-675,732.16 -492.84,732.16 C5.1@-472.7,712.03 R6.2@-409.5,712.03 R5.2@-344.61,712.03
PB6: C6.1 R7.2 R8.2 S4.2 U3.42 | length 1832
  Top Layer w15: v1(-5095,-615) -4977.51,-615 -4720,-872.51 -4720,-1636.59 v2(-4640.47,-1716.12)
  Bottom Layer w10: U3.42@-4686.92,-1788.34 -4640.47,-1741.89 v2(-4640.47,-1716.12)
  Bottom Layer w15: S4.2@-5332.94,-635.5 -5162.92,-635.5 C6.1@-5143.42,-655 C6.1@-5135,-655 ; v1(-5095,-615) C6.1@-5135,-655 ; R7.2@-5015.21,-655 R8.2@-5079.31,-655 C6.1@-5135,-655
PB7: C7.1 R9.2 R10.2 S5.2 U3.43 | length 1613.8
  Top Layer w15: v2(-4610.47,-1716.12) -4610,-1715.65 -4610,-745 -4505,-640 -4505,-635.5 S5.2@-4453.35,-635.5
  Bottom Layer w10: U3.43@-4673.01,-1802.26 -4610.47,-1739.72 v2(-4610.47,-1716.12)
  Bottom Layer w15: S5.2@-4453.35,-635.5 -4283.33,-635.5 -4263.83,-655 C7.1@-4261.27,-655 R10.2@-4197.39,-655 R9.2@-4135.63,-655
PB8: C8.1 R11.2 R12.2 S6.2 U3.45 | length 2139.7
  Top Layer w15: v2(-4580,-1765) -4580,-1345 -4045,-810 -4045,-807.43 -3873.07,-635.5 S6.2@-3573.76,-635.5
  Bottom Layer w10: U3.45@-4645.17,-1830.1 -4580,-1764.93 v2(-4580,-1765)
  Bottom Layer w15: S6.2@-3573.76,-635.5 -3403.74,-635.5 -3384.24,-655 C8.1@-3379.13,-655 R12.2@-3315.46,-655 R11.2@-3256.04,-655
PB9: C9.1 R13.2 R14.2 S7.2 U3.46 | length 2956.8
  Top Layer w10: v2(-4581.12,-1806.12) -4550,-1775
  Top Layer w15: -4550,-1775 -4550,-1445 -3820,-715 -3475,-715 -3395.5,-635.5 S7.2@-2694.18,-635.5
  Bottom Layer w10: U3.46@-4631.25,-1844.02 -4593.35,-1806.12 v2(-4581.12,-1806.12)
  Bottom Layer w15: S7.2@-2694.18,-635.5 -2524.15,-635.5 -2504.65,-655 C9.1@-2496.99,-655 R14.2@-2433.53,-655 R13.2@-2376.45,-655
PB10: C10.1 R15.2 R16.2 S8.2 U3.21 | length 4418.7
  Top Layer w15: v1(-6592.14,767.59) -6569.73,790 -6496.94,790 -6455,748.06 -6455,496.88 -5906.31,-51.81 -5906.31,-1563.69 -5537.53,-1932.47 -5172.53,-1932.47 -5060,-2045 v2(-5005.05,-2045)
  Bottom Layer w10: v2(-5005.05,-2045) -4996.67,-2045 -4943.05,-1991.38 U3.21@-4943.05,-1988.79
  Bottom Layer w15: S8.2@-6832.11,732.16 -6662.09,732.16 C10.1@-6644.83,714.9 ; C10.1@-6647.7,712.03 R16.2@-6583.6,712.03 R15.2@-6519.61,712.03 ; v1(-6592.14,767.59) C10.1@-6644.83,714.9 ; R15.2@-6514.39,712.66 -6642.59,712.66 C10.1@-6644.83,714.9
PB11: C11.1 R17.2 R18.2 S9.2 U3.22 | length 4098.4
  Top Layer w15: S9.2@-5952.53,732.16 -6095.92,732.16 -6185,643.08 -6185,433.58 -5800.67,49.24 -5800.67,-1517.8 -5425.97,-1892.5 -5172.69,-1892.5 -5050.19,-2015 v2(-5005,-2015)
  Bottom Layer w10: v2(-5005,-2015) -5005,-2019.2 -5004.2,-2020 -4959.06,-1974.86 U3.22@-4956.97,-1974.86
  Bottom Layer w15: S9.2@-5952.53,732.16 -5782.5,732.16 C11.1@-5763.96,713.63 ; C11.1@-5765.56,712.03 C11.1@-5763.96,713.63 ; v1(-5687.59,790) C11.1@-5763.96,713.63 ; R17.2@-5634.8,712.66 -5763,712.66 C11.1@-5763.96,713.63
PB12: C12.1 R19.2 R20.2 S10.2 U3.25 | length 3741.5
  Top Layer w15: v2(-5090,-1860) -5327.32,-1860 -5680,-1507.32 -5680,247.08 -5194.92,732.16 S10.2@-5072.94,732.16
  Bottom Layer w10: v2(-5090,-1860) U3.25@-4996.67,-1860 ; U3.25@-5001.67,-1855 U3.25@-4996.67,-1860 ; U3.25@-4984.81,-1871.86 U3.25@-4996.67,-1860
  Bottom Layer w15: S10.2@-5072.94,732.16 -4902.92,732.16 -4883.42,712.66 R19.2@-4755.21,712.66
PB13: C13.1 R21.2 R22.2 S11.2 U3.26 | length 4382.7
  Top Layer w15: v2(-5060,-1825) -5253.36,-1825 -5565,-1513.36 -5565,225 -5150,640 -4995,640 -4902.84,732.16 S11.2@-4193.35,732.16
  Bottom Layer w10: v2(-5060,-1825) -5003.82,-1825 U3.26@-4970.88,-1857.94
  Bottom Layer w15: S11.2@-4193.35,732.16 -4023.33,732.16 -4003.83,712.66 R21.2@-3875.63,712.66
PB14: C14.1 R23.2 R24.2 S12.2 U3.27 | length 4833.5
  Top Layer w15: v2(-5035,-1792.27) -5180.71,-1792.27 -5455,-1517.98 -5455,-1480 -5455,-150 -4655,650 -4090,650 -4007.84,732.16 S12.2@-3313.76,732.16
  Bottom Layer w10: v2(-5035,-1792.27) -5008.72,-1792.27 U3.27@-4956.97,-1844.02
  Bottom Layer w15: S12.2@-3313.76,732.16 -3143.74,732.16 -3124.24,712.66 R23.2@-2996.04,712.66
SWCLK: P4.2 U3.37 | length 1310.5
  Top Layer w10: v2(-4743.94,-1853.09) -4743.94,-1932.47 -4817.85,-2006.38 -4817.85,-2457.15 -4727.31,-2547.69 v2@-4351.81,-2547.69
  Top Layer w15: v2@-4351.81,-2547.69 v2(-4350,-2549.5)
  Bottom Layer w10: U3.37@-4756.53,-1718.74 -4756.53,-1722.68 -4784.56,-1750.72 -4784.56,-1785.27 -4743.94,-1825.9 v2(-4743.94,-1853.09) v2@-4743.94,-1860
SWIO: P4.3 U3.34 | length 1254
  Top Layer w10: v2(-4777.49,-1853.09) -4777.49,-1932.9 -4845.61,-2001.03 -4845.61,-2469.5 -4741.92,-2573.19 v2(-4445,-2573.19)
  Bottom Layer w10: U3.34@-4859.53,-1746.58 -4777.49,-1828.62 v2(-4777.49,-1853.09) ; P4.3@-4427.92,-2570.92 P4.3@-4410,-2553
U1_RX: P2.2 U3.31 U17.6 | length 4234.9
  Top Layer w10: v2(-5115,-2515) -5115,-2488.99 -4927.63,-2301.62 -4927.63,-1948.31 v2(-4874.32,-1895)
  Bottom Layer w10: U17.6@-8055.47,-1597.68 -8040,-1582.2 -8040,-1525.64 -8004.36,-1490 -5199.63,-1490 U3.31@-4901.29,-1788.34 -4871.17,-1818.46 -4871.17,-1891.85 v2(-4874.32,-1895)
  Bottom Layer w15: v2@-5116.29,-2515 v2(-5115,-2515) P2.2@-5115,-2553
U1_TX: P2.3 U3.30 U17.7 | length 4189.7
  Top Layer w10: v2@-5180,-2524.29 -4948.5,-2292.79 -4948.5,-1923.68 -4896.36,-1871.54 v2(-4895,-1871.54)
  Top Layer w15: v2(-5180,-2525) v2@-5180,-2524.29
  Bottom Layer w10: U17.7@-8005.47,-1597.68 -8017.47,-1585.68 -8017.47,-1545.39 -7992.39,-1520.31 -5197.16,-1520.31 U3.30@-4915.21,-1802.26 ; U3.30@-4915.21,-1804.23 -4911.96,-1804.23 -4887.17,-1829.02 -4887.17,-1862.34 -4895,-1870.18 v2(-4895,-1871.54)
  Bottom Layer w15: P2.3@-5215,-2553 -5208,-2553 v2(-5180,-2525)
VCC_3.3V: C2.2 C18.2 C19.2 C20.1 C21.1 C22.1 C23.1 C24.1 C25.1 C30.2 C46.2 C47.2 C48.2 C49.2 C66.1 C67.1 C68.1 C69.1 C70.1 C71.1 C72.1 C73.1 C102.1 C103.1 C104.1 P1.2 P2.4 P4.4 R25.1 R26.1 R27.1 R28.1 R29.1 R29.4 R29.8 R29.9 R31.1 R31.4 R31.8 R31.9 R33.1 R40.2 R51.1 R81.2 S1.3 S2.3 S3.3 S4.3 S5.3 S6.3 S7.3 S8.3 S9.3 S10.3 S11.3 S12.3 U3.9 U3.24 U3.36 U3.48 U18.2 | length 36818.2
  Top Layer w15: v3(-5083.62,-1923.54) v3@-5078.8,-1923.54
  Top Layer w50: v3@-5078.8,-1923.54 v3(-4827.88,-1672.62)
  Bottom Layer w10: -5106.68,-2228.32 -5106.68,-2228.17 ; U3.36@-4831.69,-1718.74 v3@-4831.69,-1676.43 ; U3.9@-4714.76,-2058.38 -4641.25,-2131.89 C103.1@-4641.25,-2163.83 ; U3.48@-4601.3,-1873.97 C73.1@-4482.58,-1873.97 ; C69.1@-4594.74,-2219.01 C69.1@-4593.32,-2219.01
  Bottom Layer w15: C71.1@-5083.62,-1943.28 -4991.72,-1943.28 U3.24@-4990,-1945
  Bottom Layer w30: R51.1@-8821.99,-2028.08 U18.2@-8821.99,-1944.04 ; R51.1@-8820.5,-2028.08 -8804.31,-2028.08 ; C68.1@-5193.36,-2033.28 -5193.36,-2141.95 -5142.73,-2192.58 -5142.42,-2192.58 -5106.68,-2228.32 -5061.68,-2273.32 -4647.62,-2273.32 C69.1@-4593.32,-2219.01 ; -5106.68,-2228.17 R81.2@-5055.7,-2177.19 ; R29.8@911.42,366.14 911.42,249.14 C21.1@923.52,237.04
  Bottom Layer w40: -8804.31,-2028.08 -8757.22,-2028.08 -8693.66,-1964.52 C46.2@-8693.66,-1944.04 ; C103.1@-4641.25,-2172.5 C69.1@-4594.74,-2219.01
  Bottom Layer w50: C25.1@-9352.04,-1181.48 -9396.94,-1181.48 -9425,-1153.43 -9425,-40 -8902.96,482.04 C24.1@-7921.48,482.04 ; C25.1@-9351.51,-1181.48 -9255,-1181.48 R31.9@-9231.75,-1204.72 ; C46.2@-8693.66,-1944.04 C48.2@-8598.66,-1944.04 C2.2@-8503.66,-1944.04 C49.2@-8408.66,-1944.04 -8339.65,-1944.04 C47.2@-8325.47,-1929.86 -8178.29,-2077.05 -5319.26,-2077.05 ; R31.8@-7938.45,366.14 -7921.48,383.11 C24.1@-7921.48,482.04 ; R31.4@-7233.72,-529.53 R31.4@-7274.53,-529.53 ; C23.1@-7117.04,-861.48 -7139.42,-883.86 R31.1@-7233.72,-883.86 -7301.14,-883.86 -7359.42,-825.58 -7359.42,-614.42 R31.4@-7274.53,-529.53 ; S4.3@-5332.94,-812.66 -4987.65,-812.66 ; P2.4@-5315,-2553 -5312.81,-2550.81 C19.2@-5312.81,-2472.3 -5312.81,-2420.3 ; v3(-5083.62,-1923.54) C71.1@-5103.36,-1943.28 C102.1@-5148.36,-1988.28 C68.1@-5193.36,-2033.28 -5237.13,-2077.05 -5312.81,-2077.05 -5312.81,-2420.3 ; v3@-4831.69,-1676.43 v3(-4827.88,-1672.62) -4827.88,-1622.98 C72.1@-4837.63,-1613.23 C104.1@-4882.63,-1568.23 C66.1@-4927.63,-1523.23 ; P1.2@-4714,-2553 -4714,-2437.45 ; R40.2@-4533.77,-1640.27 -4519.07,-1625.57 -4389.42,-1625.57 ; P4.4@-4510,-2553 -4510,-2478.21 -4566.95,-2421.26 -4629.41,-2421.26 -4629.77,-2420.9 -4676.17,-2420.9 -4676.53,-2421.26 -5221.84,-2421.26 -5222.8,-2420.3 -5312.81,-2420.3 ; C73.1@-4482.58,-1873.97 C70.1@-4437.58,-1828.97 C67.1@-4392.58,-1783.97 -4389.42,-1783.97 -4389.42,-1625.57 ; R33.1@-1691.32,-986.44 -1619.88,-915 ; S3.3@-675,555 S2.3@-1554.59,555 S1.3@-2434.18,555 S12.3@-3313.76,555 S11.3@-4193.35,555 S10.3@-5072.94,555 S9.3@-5952.53,555 S8.3@-6832.11,555 -7355,555 ; R29.9@-381.89,-1204.72 -400.13,-1186.48 C22.1@-507.04,-1186.48 -523.52,-1186.48 -585,-1125 ; 894.31,482.04 42.04,482.04 -585,-145 -585,-1070 ; R29.8@911.42,366.14 911.42,464.94 905.68,470.68 995,560 1330,560 1465,425 1465,-430 1564.53,-529.53 R29.4@1616.14,-529.53 ; R29.4@1610.67,-535 1550,-535 1500,-585 1500,-805 1578.86,-883.86 R29.1@1616.14,-883.86 1655.51,-844.49 C20.1@1732.96,-844.49 ; R28.1@1645.5,-2441.92 R26.1@968.83,-2441.92 R25.1@630.5,-2441.92 230.97,-2441.92 -585,-1625.95 -585,-1125 ; C24.1@-7921.48,482.04 C24.1@-7921.48,487.04 -7921.48,498.52 -7865,555 -7355,555 ; -7355,555 -7355,-469.52 -7294.99,-529.53 R31.4@-7274.53,-529.53 ; -4987.65,-812.66 S5.3@-4453.35,-812.66 S6.3@-3573.76,-812.66 S7.3@-2694.18,-812.66 -1712.34,-812.66 -1455,-1070 -585,-1070 ; -4987.65,-812.66 -4994.46,-819.47 -4994.46,-1456.41 C66.1@-4927.63,-1523.23 ; C66.1@-4927.63,-1523.23 -4854.4,-1450 -4473.68,-1450 -4389.42,-1534.26 -4389.42,-1625.57 ; -585,-1125 -585,-1070
  Bottom Layer w60: S9.3@-5952.53,555 -5952.53,-487.47 -5627.34,-812.66 S4.3@-5332.94,-812.66
pads on no net: "R31. " J1.4 J1.6 J1.7 J1.$$$1 J1.$$$2 R29. R33.4 R33.5 S1.1 S2.1 S3.1 S4.1 S5.1 S6.1 S7.1 S8.1 S9.1 S10.1 S11.1 S12.1 U3.1 U3.19 U3.28 U3.29 U3.38 U17.4

## Polygon pours and split planes (outlines as drawn)
AGND on Bottom Layer "Bottom Layer-AGND" (solid, remove dead copper, pour order 52): -9555,1165 -9555,-2615.84 581.39,-2616.82 1926.04,-2616.16 1926.04,1165
AGND on Top Layer "Top Layer-AGND" (solid, pour order 64): 1924.53,-2616.12 1924.53,1160 -9560,1160 -9560,-2616.12